# Altium PCB Power_Board_Layout_V2.PcbDoc (part 1 of 2)
Units mil, origin at the board's own origin, x right, y up, seen from the top; angles counter-clockwise.
Board outline 3500 x 4000 mil, 4 copper layers (Top Layer, GND, Power, Bottom Layer), stack 61.417 mil thick; 67 components, 53 nets, 226 pads, 441 vias.
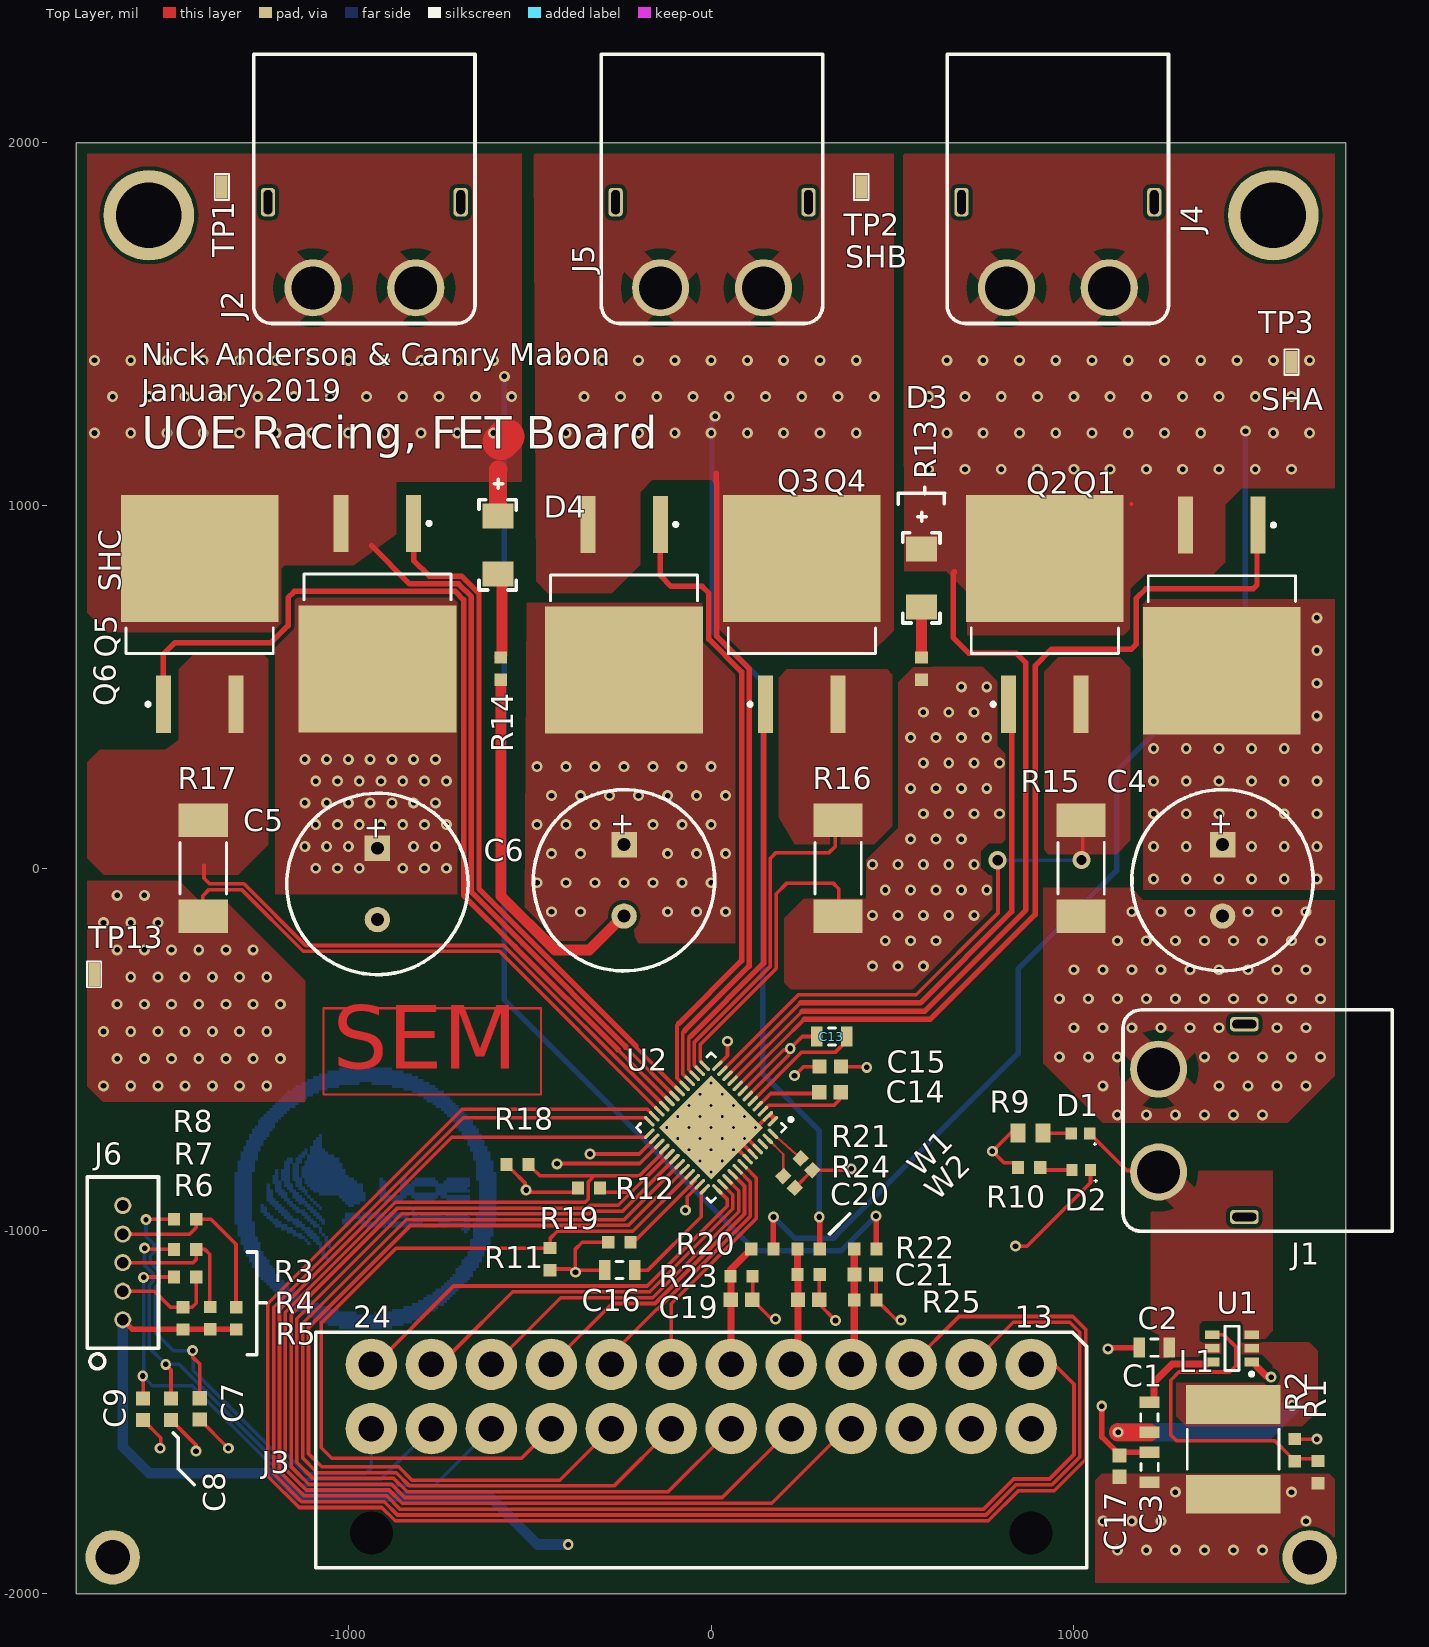
[diagram p0: Top Layer view]
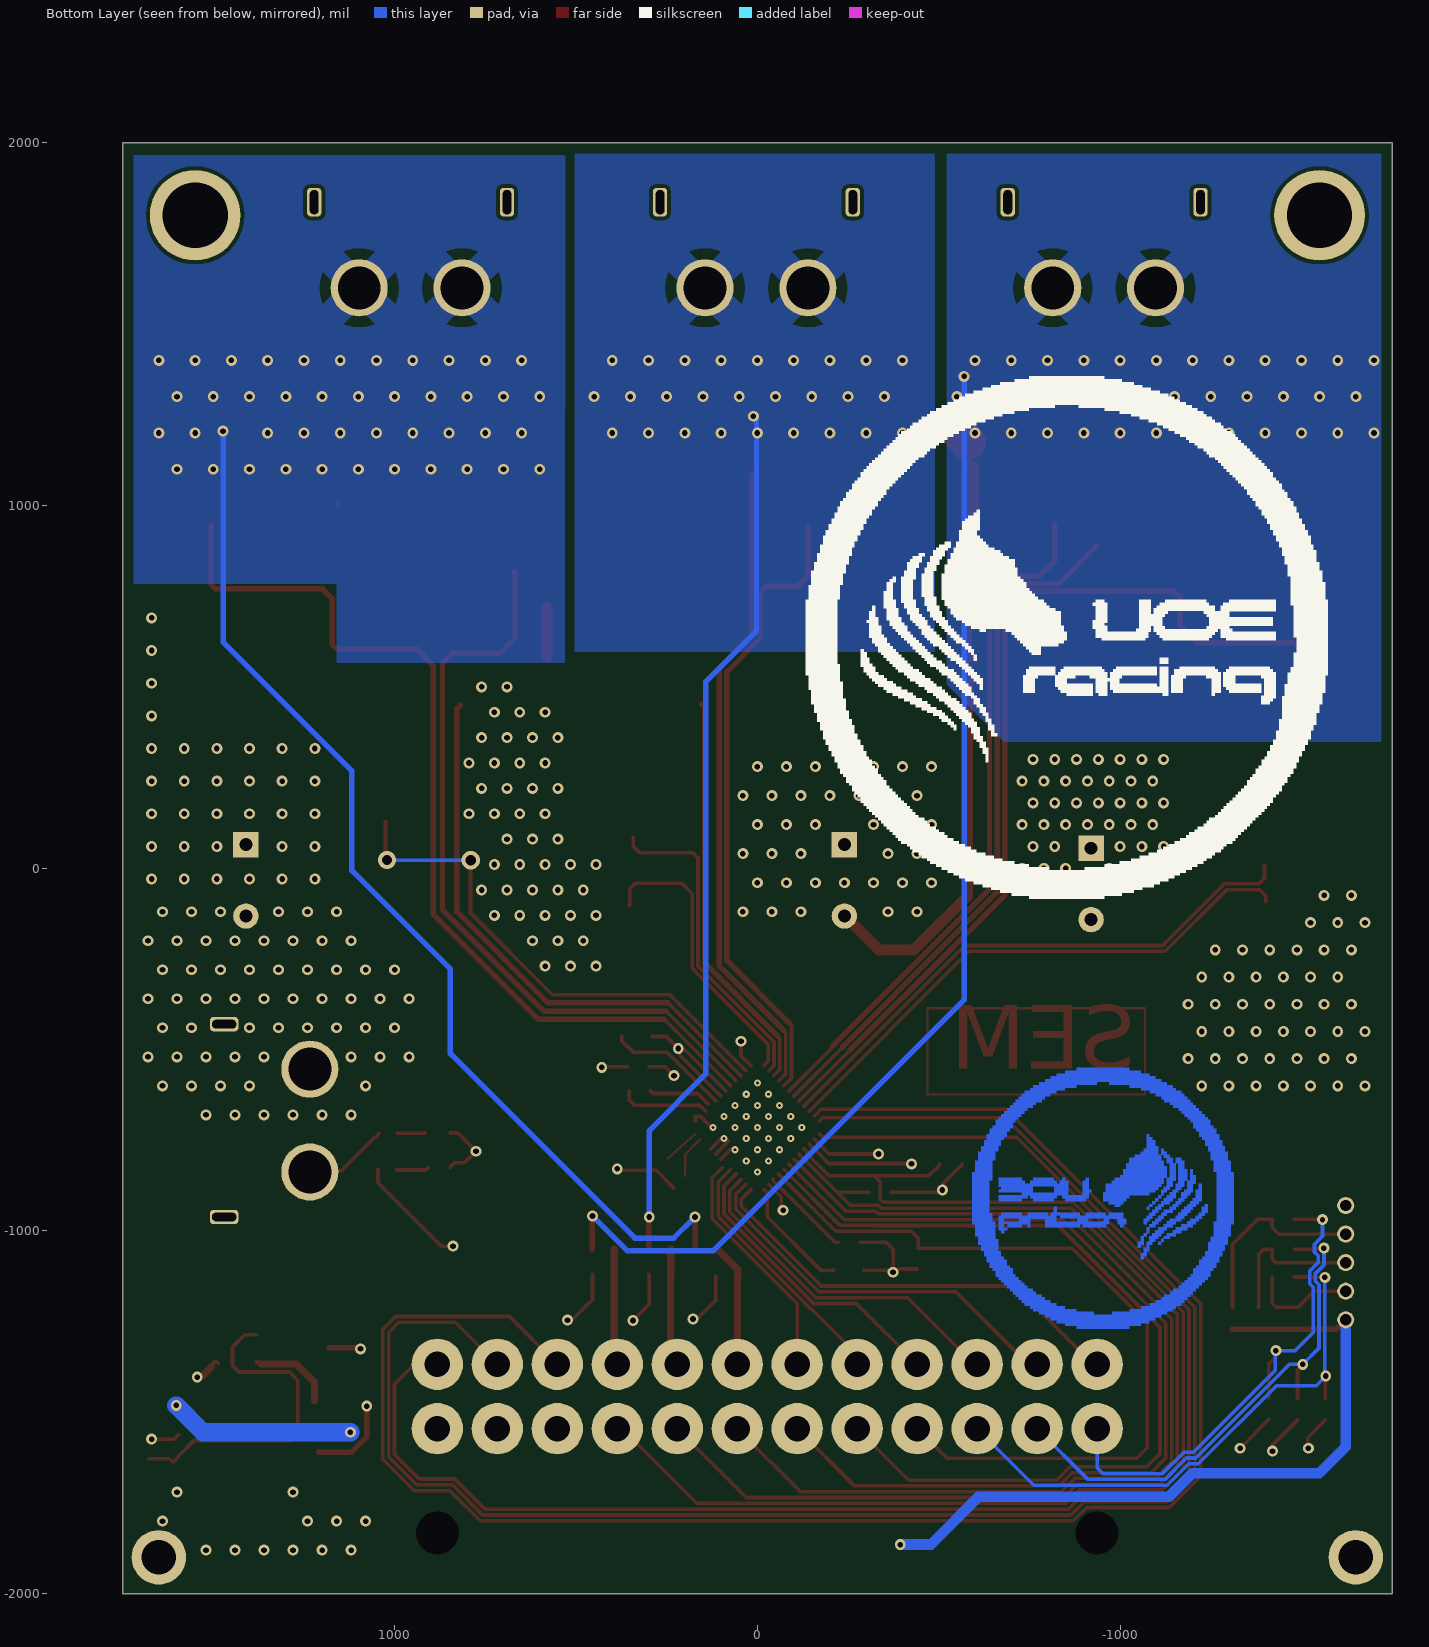
[diagram p1: Bottom Layer view, seen from below]
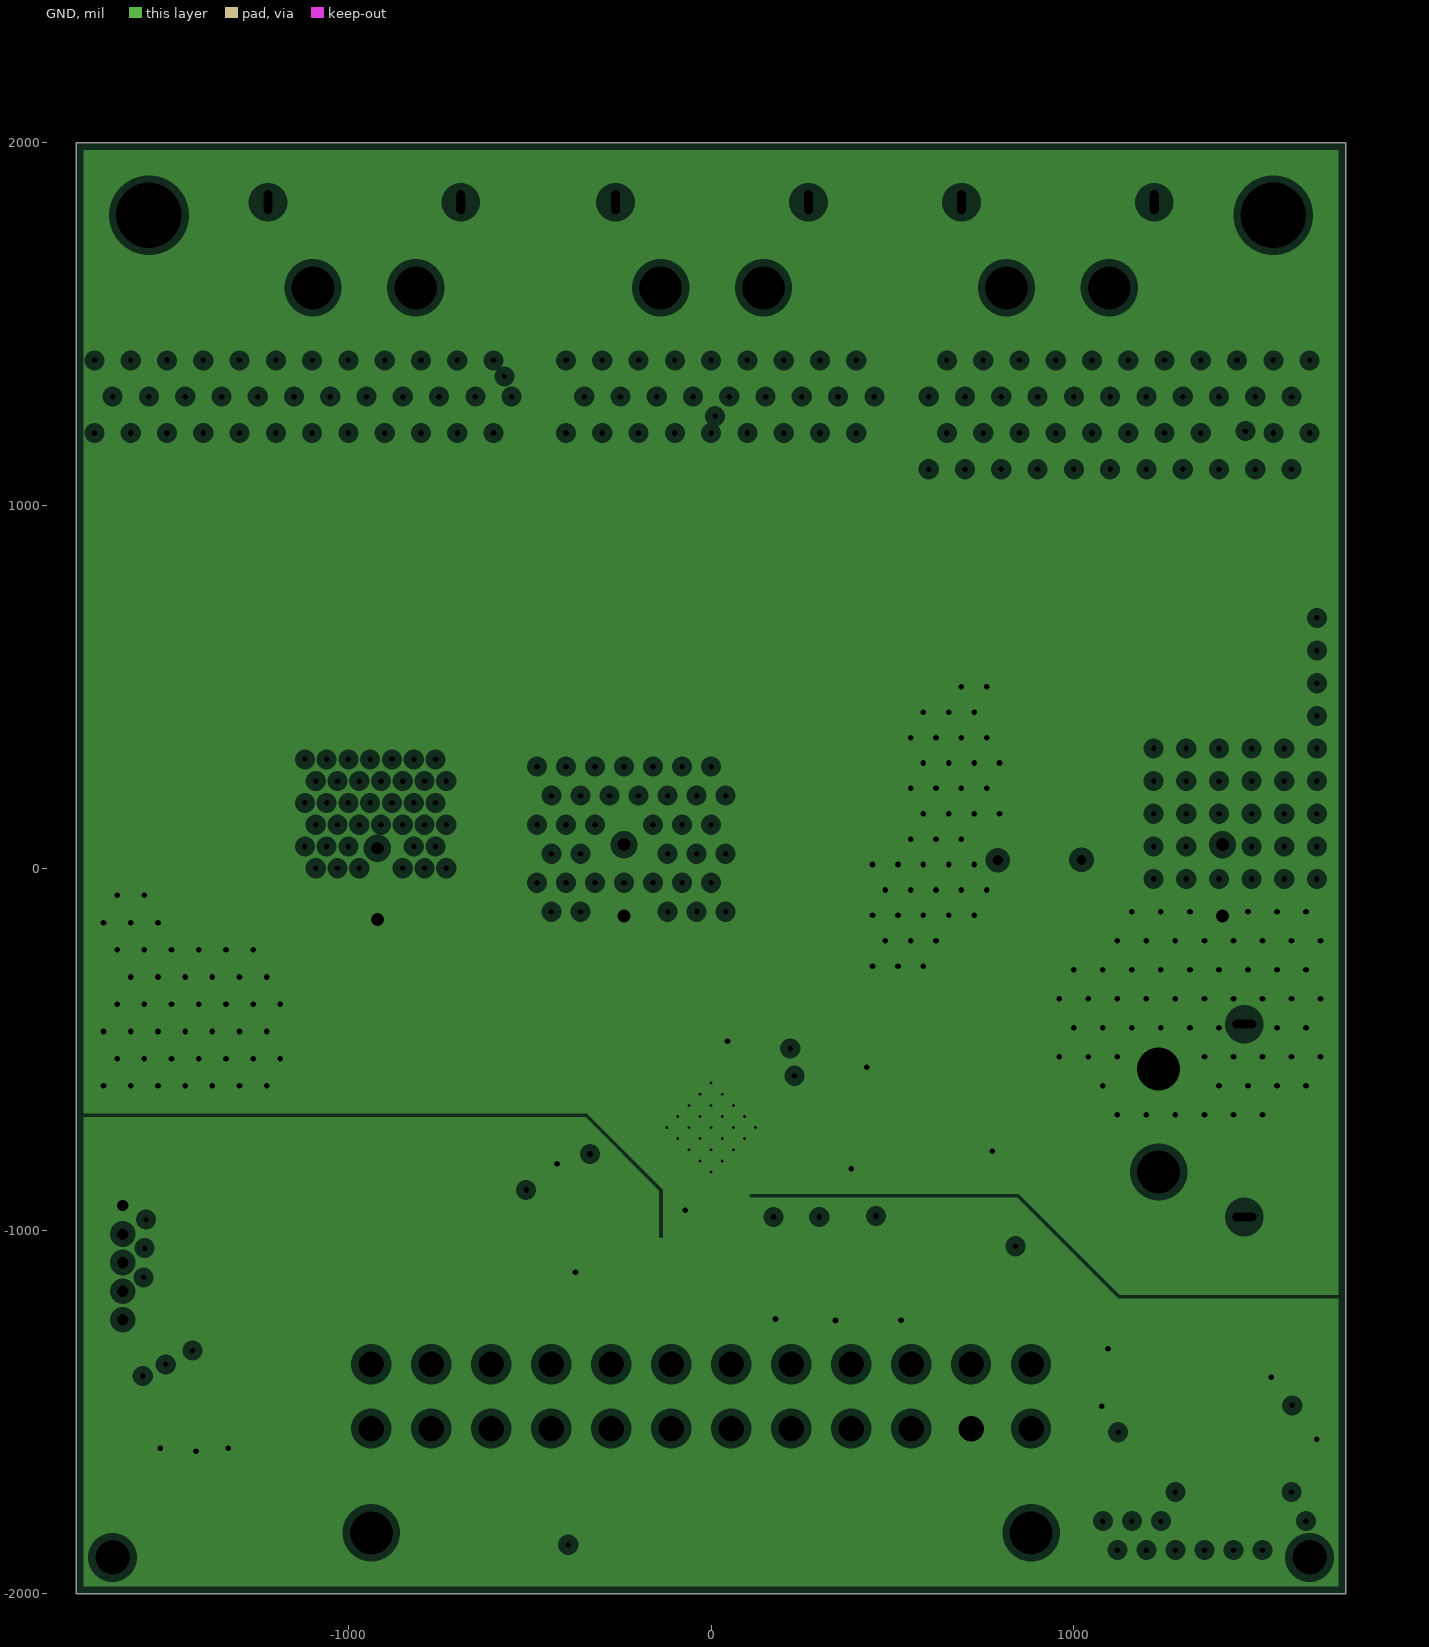
[diagram p2: GND, clearances drawn from the general rule]
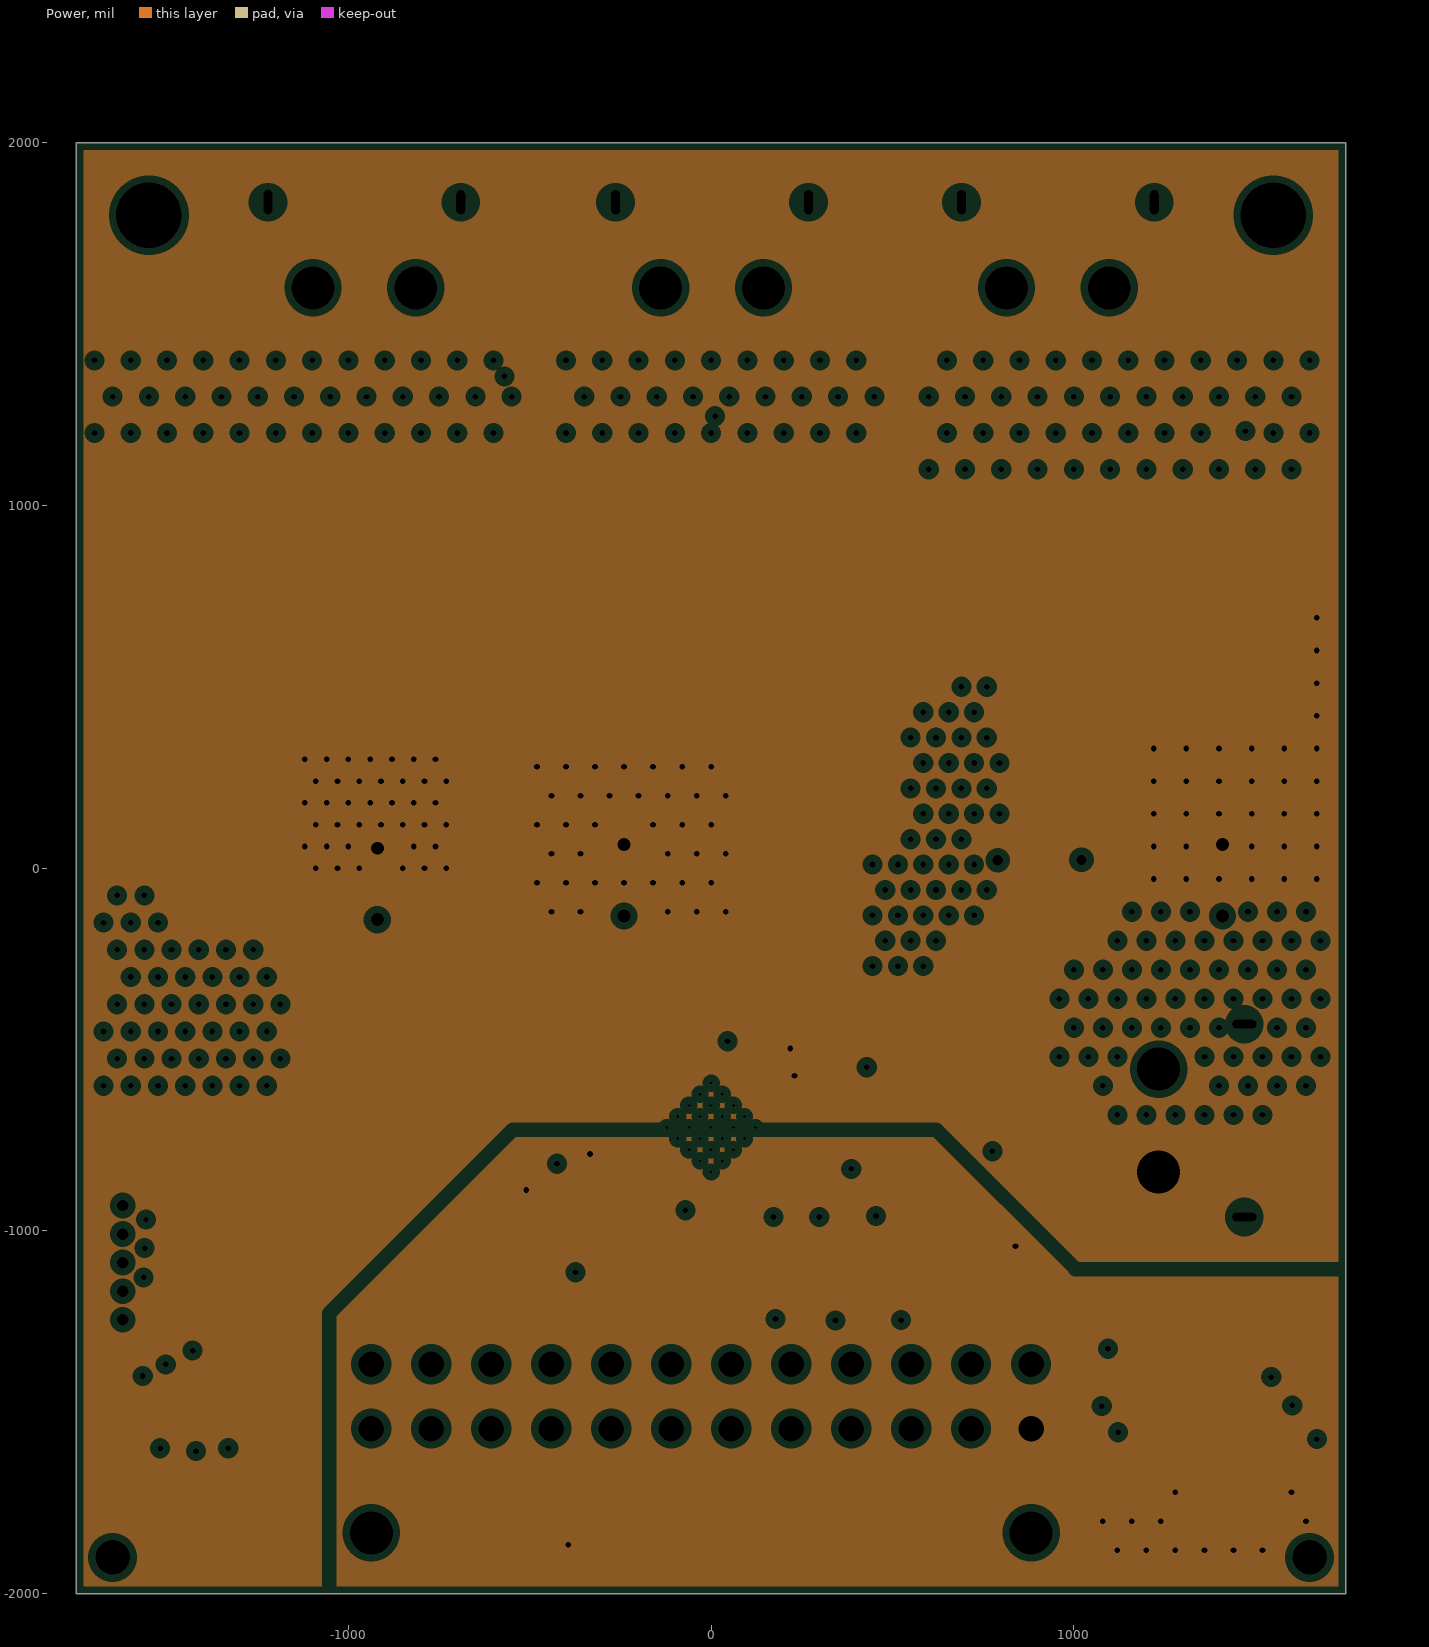
[diagram p3: Power, clearances drawn from the general rule]

## Layer stack, top to bottom
Top Solder: solder mask 1.3779, Solder Resist, Dk 3.5
Top Layer: signal copper 2.7559
Dielectric 2: prepreg 4.3307, PP-006, Dk 4.1
GND: plane copper 1.3778
Dielectric 4: core 44.4882, Core-009, Dk 4.5
Power: plane copper 1.3778
Dielectric 3: prepreg 4.3307, PP-006, Dk 4.1
Bottom Layer: signal copper 2.7559
Bottom Solder: solder mask 1.3779, Solder Resist, Dk 3.5

## Board outline
-1750,-2000 -1750,2000 1750,2000 1750,-2000

## Design rules (kind name [scope] priority, off if disabled: settings)
BoardOutlineClearance [All] p1: gap=30 ignorepadtopadclearanceinfootprint=FALSE
Clearance [All] p1: gap=6 ignorepadtopadclearanceinfootprint=TRUE except(8: Poly-Region Poly-Text Poly-Hole; 10: Arc-Poly Track-Poly SMDPad-Poly THPad-Poly Via-Poly Fill-Poly Poly-Poly)
HoleSize [All] p1: absolutevalues=TRUE maxlimit=300 minlimit=11 maxpercent=80.000 minpercent=20.000
MinimumAnnularRing MinimumAnnularRing_1 [All] p1: minimumring=10
MinimumAnnularRing [IsVia] p2: minimumring=10
MinimumSolderMaskSliver [All] p1: minsoldermaskwidth=6
PlaneClearance [InNetClass('HighPower-Motor')] p1: clearance=20
PlaneConnect [All] p1: planeconnectstyle=Direct reliefexpansion=20 reliefentries=4 reliefconductorwidth=10 reliefairgap=10
PolygonConnect [InComponentClass('Thermal Releif Needed')] p1: thpad.connectstyle=Relief thpad.reliefconductorwidth=80 thpad.reliefentries=4 thpad.polygonreliefangle="45 Angle" thpad.airgapwidth=30 smdpad.connectstyle=Direct smdpad.reliefconductorwidth=10 smdpad.reliefentries=4 smdpad.polygonreliefangle="90 Angle" smdpad.airgapwidth=10 via.connectstyle=Direct via.reliefconductorwidth=10 via.reliefentries=4 via.polygonreliefangle="90 Angle" via.airgapwidth=10
PolygonConnect "Current Resistors Connect" [(InComponentClass('Current Resistors'))] p2: connectstyle=Direct reliefconductorwidth=50 reliefentries=4 polygonreliefangle="45 Angle" airgapwidth=10
PolygonConnect "High Power Connect" [InNetClass('HighPower-Motor')] p3: connectstyle=Direct reliefconductorwidth=100 reliefentries=4 polygonreliefangle="45 Angle" airgapwidth=10
PolygonConnect Defualt [All] p4: connectstyle=Direct reliefconductorwidth=10 reliefentries=4 polygonreliefangle="90 Angle" airgapwidth=10
RoomDefinition "3.3V Regulator" [InComponentClass('3.3V Regulator')] p1: confinementstyle=ConfineIn formatcopy=TRUE lockcomponents=FALSE outline 1728,-1900.87 1728,-1030.87 1142.6,-1030.87 1142.6,-1900.87
RoutingVias [All] p1: holewidth=15.62 width=30 viastyle="Through Hole" minholewidth=12 minwidth=20 maxholewidth=28 maxwidth=50
SolderMaskExpansion [All] p1: expansion=4
Width [All] p1: maxlimit=200 minlimit=6 preferedwidth=10
26 further rules are at their usual default settings.

## Classes and differential pairs
component class "Thermal Releif Needed": J1 J2 J4 J5
component class "Current Resistors": R15 R16 R17 TP1 TP2 TP3 TP13
net class HighPower-Motor: +3.3V NetC1_2 SHA SHB SHC SPA SPB SPC V_BATT
component class "Gate Driver & H-Bridge": C13 C14 C15 C16 C17 C19 C20 C21 D3 D4 Q1 Q2 Q3 Q4 Q5 Q6 R11 R12 R13 R14 R15 R16 R17 R18 R19 R20 R21 R22 R23 R24 R25 TP1 TP2 TP3 U2
component class "Connectors & LEDs": C4 C5 C6 C7 C8 C9 D1 D2 J1 J2 J3 J4 J5 J6 R3 R4 R5 R6 R7 R8 R9 R10 TP13
component class "3.3V Regulator": C1 C2 C3 L1 R1 R2 U1

## Components (designator, comment, footprint, x,y, rotation, side; value= is the part's Value field where it differs from the comment)
C1 "Cap" CAPC2012X06N 1208,-1514 r270 top value=100nF
C2 "Cap" CAPC2012X06N 1222,-1322 r0 top value="1uF, 50V"
C3 "Cap" CAPC2012X06N 1209,-1651 r270 top value=22uF
C4 "470uF" ECA1JHG471 1410,-40 r270 top
C5 "470uF" ECA1JHG471 -920,-50 r270 top
C6 "470uF" ECA1JHG471 -240,-40 r270 top
C7 "16nF" "0603 CAP Medium" -1410,-1490.47 r90 top
C8 "16nF" "0603 CAP Medium" -1489,-1491.47 r90 top
C9 "16nF" "0603 CAP Medium" -1566,-1491.53 r90 top
C13 "Cap" CAPC2012X06N 333,-464 r0 top value=1uF
C14 "Cap" "0603 CAP Medium" 328,-618 r180 top value="47nF, 50V"
C15 "Cap" "0603 CAP Medium" 328.53,-546.97 r180 top value="0.1uF, 50V"
C16 "Cap" CAPC2012X06N -252.34,-1108 r0 top value=1uF
C17 "Cap" "0603 CAP Medium" 1126,-1648.47 r270 top value=0.1uF
C19 "Cap" "0603 CAP Medium" 84,-1190 r180 top value=47nF
C20 "Cap" "0603 CAP Medium" 268.94,-1189.96 r180 top value=47nF
C21 "Cap" "0603 CAP Medium" 425,-1120 r180 top value=47nF
D1 "RED LED" "CAPC1608X05L - Polarized" 1018,-731 r180 top
D2 "RED LED" "CAPC1608X05L - Polarized" 1020.41,-832 r180 top
D3 "Diode 11DQ03" Zener 580,800 r90 top
D4 "Diode 11DQ03" Zener -588,891 r90 top
J1 "XT-60" XTC60PW-M 1233.78,-695.75 r270 top
J2 "XT-60" XTC60PW-M -956,1600 r0 top
J3 "Molex 24-Pos" PCBComponent_1 -27.26,-1456.42 r0 top
J4 "XT-60" XTC60PW-M 956,1600 r0 top
J5 "XT-60" XTC60PW-M 2.5,1600 r0 top
J6 "5-Pos" "Hirose 5-pos" -1622,-1087.48 r270 top
L1 "Inductor" INDC8063X52N 1439,-1602 r270 top value=10uH
Q1 "CSD18536KTTT" DPAK254P1510X470-3M 1408,698 r270 top
Q2 "CSD18536KTTT" DPAK254P1510X470-3M 920,700 r90 top
Q3 "CSD18536KTTT" DPAK254P1510X470-3M -240,700 r270 top
Q4 "CSD18536KTTT" DPAK254P1510X470-3M 250,700 r90 top
Q5 "CSD18536KTTT" DPAK254P1510X470-3M -920,702.54 r270 top
Q6 "CSD18536KTTT" DPAK254P1510X470-3M -1410,700 r90 top
R1 "Res3" "RES 0603 MEDIUM" 1673,-1665 r90 top value=100K
R2 "Res3" "RES 0603 MEDIUM" 1609,-1604.49 r90 top value=22K
R3 "Res3" "RES 0603 MEDIUM" -1455.5,-1241 r270 top value=10K
R4 "Res3" "RES 0603 MEDIUM" -1381,-1240.51 r270 top value=10K
R5 "Res3" "RES 0603 MEDIUM" -1309,-1241 r270 top value=10K
R6 "Res3" "RES 0603 MEDIUM" -1450,-1127 r0 top value=100
R7 "Res3" "RES 0603 MEDIUM" -1450,-1051 r0 top value=100
R8 "Res3" "RES 0603 MEDIUM" -1450,-968 r0 top value=100
R9 "Res3" "0805 Res" 881,-730 r180 top value=1.5K
R10 "Res3" "RES 0603 MEDIUM" 877,-825 r180 top value=100
R11 "Res3" "RES 0603 MEDIUM" -444,-1078 r90 top value=10K
R12 "Res3" "RES 0603 MEDIUM" -336.51,-882 r180 top value=10K
R13 "Res3" "RES 0603 MEDIUM" 580,550 r90 top value=100
R14 "Res3" "RES 0603 MEDIUM" -580,550 r90 top value=100
R15 "Res3" RESC8032X08N 1020,0 r90 top value=0.001
R16 "Res3" RESC8032X08N 350,0 r90 top value=0.001
R17 "Res3" RESC8032X08N -1400,0 r90 top value=0.001
R18 "Res3" "RES 0603 MEDIUM" -533.51,-817 r180 top value=10K
R19 "Res3" "RES 0603 MEDIUM" -253,-1031.06 r0 top value=10K
R20 "Res3" "RES 0603 MEDIUM" 141,-1050 r180 top value=42.2K
R21 "Res3" "RES 0603 MEDIUM" 268.94,-1050 r180 top value=42.2K
R22 "Res3" "RES 0603 MEDIUM" 425,-1050 r180 top value=42.2K
R23 "Res3" "RES 0603 MEDIUM" 84,-1125.1 r0 top value=4.99K
R24 "Res3" "RES 0603 MEDIUM" 268.94,-1119.96 r0 top value=4.99K
R25 "Res3" "RES 0603 MEDIUM" 425,-1190 r0 top value=4.99K
TP1 "1625854-3" TE_RCU-0C -1349,1878 r90 top
TP2 "1625854-3" TE_RCU-0C 414,1878 r90 top
TP3 "1625854-3" TE_RCU-0C 1600,1395 r90 top
TP13 "1625854-3" TE_RCU-0C -1701,-293 r90 top
U1 "TPS54308DDCR" SOT95P280X110-6N 1436,-1324 r180 top
U2 "Driver Chip" QFN50P700X700X100_HS-49N 0,-715 r225 top
W1 "SMD Jumper" "SMD Jumper" 213,-863 r135 top
W2 "SMD Jumper" "SMD Jumper" 261,-814.28 r135 top

## Footprints (in the part's own frame and the unit in brackets; to place one, negate y for a bottom-side part, rotate by r counter-clockwise, add the part's x,y. Pads: shape width x height; smd on the part's side, far side on the other; paste and mask are expansions set on the pad)
"0603 CAP Medium" [mm]
  rect 1x1 smd: 1(-0.75,0) 2(0.75,0)
  body extent -0.85,-0.48 0.85,0.48, height 0.9
"0805 Res" [mm] "Chip Resistor, 2-Leads, Body 2.00x1.25mm, IPC Medium Density"
  rect 1.05x1.35 smd: 1(-0.875,0) 2(0.875,0)
  body extent -1.05,-0.67 1.05,0.67, height 0.65
"CAPC1608X05L - Polarized" [mm] "Chip Capacitor, 2-Leads, Body 1.60x0.80mm, IPC High Density"
  rect 0.8x0.85 smd: 1(-0.65,0) 2(0.65,0)
  silkscreen extent -1.14,0.63 -0.89,0.88, body extent -0.85,-0.45 0.85,0.45, height 0.5
CAPC2012X06N [mm] "Chip Capacitor, 2-Leads, Body 2.00x1.25mm, IPC Medium Density"
  rect 0.8x1.4 smd: 1(-1.05,0) 2(1.05,0)
  silkscreen extent -0.25,-0.6 0.25,0.6, body extent -1.05,-0.67 1.05,0.67, height 0.6
DPAK254P1510X470-3M [mm] "D2-PAK, 3-Pads, Body 7.73x8.49mm (max), IPC Low Density"
  rect 4x1.05 smd: 1(-6.3,2.54) 3(-6.3,-2.54)
  rect 8.9x11.05 smd: 2(3.9,0)
  silkscreen extent -6.42,-5.15 -0.95,5.15, body extent -6.98,-5.22 8.12,5.22, height 4.7
ECA1JHG471 [mil] "1"
  rect 70x70 hole 35.43: 1(-105,0)
  round 70 hole 35.43: 2(91.85,0)
  silkscreen extent -257,-250 243,250, body extent -253,-246 240,246, height 787
"Hirose 5-pos" [mm]
  round 1.2 hole 0.8: 1(4,0) 2(2,0) 3(0,0) 4(-2,0) 5(-4,0)
  silkscreen extent -6,-2.5 7.43,2.5
INDC8063X52N [mm] "Chip Inductor, 2-Leads, Body 8.00x6.30mm, IPC Medium Density"
  rect 2.72x6.62 smd: 1(-3.145,0) 2(3.145,0)
  silkscreen extent -1.4,-3.21 1.4,3.21, body extent -4.15,-3.3 4.15,3.3, height 5.2
PCBComponent_1 [mm]
  round 3.6 hole 1.8: 1(23.1,-2.25) 2(18.9,-2.25) 3(14.7,-2.25) 4(10.5,-2.25) 5(6.3,-2.25) 6(2.1,-2.25) 7(-2.1,-2.25) 8(-6.3,-2.25) 9(-10.5,-2.25) 10(-14.7,-2.25) 11(-18.9,-2.25) 12(-23.1,-2.25) 13(23.1,2.25) 14(18.9,2.25) 15(14.7,2.25) 16(10.5,2.25) 17(6.3,2.25) 18(2.1,2.25) 19(-2.1,2.25) 20(-6.3,2.25) 21(-10.5,2.25) 22(-14.7,2.25) 23(-18.9,2.25) 24(-23.1,2.25)
  round 1.524 hole 3: ""(-23.1,-9.55) ""(23.1,-9.55)
  silkscreen extent -27,-12 27,4.5, body extent -26,-16.8 26,8.4, height 11.4
QFN50P700X700X100_HS-49N [mm] "QFN, 48-Leads, Body 7.00x7.00mm, Pitch 0.50mm, Thermal Pad 5.15x5.15mm, IPC Medium Density"
  oval 0.95x0.25 smd: 1(-3.375,2.75) 2(-3.375,2.25) 3(-3.375,1.75) 4(-3.375,1.25) 5(-3.375,0.75) 6(-3.375,0.25) 7(-3.375,-0.25) 8(-3.375,-0.75) 9(-3.375,-1.25) 10(-3.375,-1.75) 11(-3.375,-2.25) 12(-3.375,-2.75) 25(3.375,-2.75) 26(3.375,-2.25) 27(3.375,-1.75) 28(3.375,-1.25) 29(3.375,-0.75) 30(3.375,-0.25) 31(3.375,0.25) 32(3.375,0.75) 33(3.375,1.25) 34(3.375,1.75) 35(3.375,2.25) 36(3.375,2.75)
  oval 0.25x0.95 smd: 13(-2.75,-3.375) 14(-2.25,-3.375) 15(-1.75,-3.375) 16(-1.25,-3.375) 17(-0.75,-3.375) 18(-0.25,-3.375) 19(0.25,-3.375) 20(0.75,-3.375) 21(1.25,-3.375) 22(1.75,-3.375) 23(2.25,-3.375) 24(2.75,-3.375) 37(2.75,3.375) 38(2.25,3.375) 39(1.75,3.375) 40(1.25,3.375) 41(0.75,3.375) 42(0.25,3.375) 43(-0.25,3.375) 44(-0.75,3.375) 45(-1.25,3.375) 46(-1.75,3.375) 47(-2.25,3.375) 48(-2.75,3.375)
  rect 5.15x5.15 smd: 49(0,0)
  silkscreen extent -4.47,-3.7 3.7,3.7, body extent -3.55,-3.55 3.55,3.55, height 1
"RES 0603 MEDIUM" [mm] "Chip Resistor, 2-Leads, Body 1.60x0.80mm, IPC Medium Density"
  rect 0.85x0.9 smd: 1(-0.775,0) 2(0.775,0)
  body extent -0.85,-0.45 0.85,0.45, height 0.55
RESC8032X08N [mm] "Chip Resistor, 2-Leads, Body 8.00x3.18mm, IPC Medium Density"
  rect 2.35x3.45 smd: 1(-3.35,0) 2(3.35,0)
  silkscreen extent -1.8,-1.63 1.8,1.63, body extent -4.15,-1.72 4.15,1.72, height 0.85
"SMD Jumper" [mm] "To be used only as a jumper"
  rect 0.8x0.85 smd: 1(-0.65,0) 2(0.508,0)
SOT95P280X110-6N [mm] "SOT23, 6-Leads, Body 2.90x2.80mm, Pitch 0.95mm, IPC Medium Density"
  rect 1x0.6 smd: 1(-1.375,0.95) 2(-1.375,0) 3(-1.375,-0.95) 4(1.375,-0.95) 5(1.375,0) 6(1.375,0.95)
  silkscreen extent -1.5,-1.55 0.5,1.92, body extent -0.88,-1.52 0.87,1.53, height 1.1
TE_RCU-0C [mm]
  rect 1.6x0.8 smd: 1(0,0)
  silkscreen extent -0.9,-0.5 0.9,0.5
XTC60PW-M [mm] "Male right angle xt60"
  round 4 hole 3: 1(3.6,0) 2(-3.6,0)
  rrect50% 1x2 hole 0.6 slot 1.7 at 90 deg: 3(-6.75,6) 4(6.75,6)
  silkscreen extent -7.75,-2.5 7.75,16.35, body extent -7.75,-1.91 7.75,16.29, height 2
Zener [mil]
  rect 70x85 smd: 1(-80,0) 2(80,0)
  silkscreen extent -124,-51 181,52

## Part data
C1 C2 C3 C13 C14 C15 C16 C17 C19 C20 C21: "Capacitor", LatestRevisionDate=17-Jul-2002, LatestRevisionNote="Re-released for DXP Platform.", PackageDescription="Radial Cap, Thru-Hole; 2 Leads; 0.3 in Pin Spacing", PackageReference=RAD-0.3, Published=8-Jun-2000, Publisher="Altium Limited"
  C1: ComponentLink1Description="0.1uF, 50V", ComponentLink1URL=https://www.digikey.ca/product-detail/en/kemet/C0805C104M5RACTU/399-1169-1-ND/411444
  C2: ComponentLink1Description="1uF, 50V", ComponentLink1URL=https://www.digikey.ca/product-detail/en/kemet/C0805C105K5RACTU/399-7409-1-ND/3317443
  C3: ComponentLink1Description="22uF, 10V", ComponentLink1URL=https://www.digikey.com/product-detail/en/tdk-corporation/C2012X7S1A226M125AC/445-14560-1-ND/3956226
  C13 C16: ComponentLink1Description="1uF, 50V", ComponentLink1URL=https://www.digikey.ca/product-detail/en/samsung-electro-mechanics/CL21B105KBFNNNG/1276-6470-1-ND/5958098
  C14 C19 C20 C21: ComponentLink1Description="0.047uF, 50V", ComponentLink1URL=https://www.digikey.ca/product-detail/en/samsung-electro-mechanics/CL10B473KB8NFNC/1276-2075-1-ND/3890161
  C15 C17: ComponentLink1Description="0.1uF, 50V", ComponentLink1URL=https://www.digikey.ca/product-detail/en/samsung-electro-mechanics/CL10B104KB8WPNC/1276-6854-1-ND/5961713
C4 C5 C6: library part ECA-1JHG471, "Cap Aluminum Lytic 470uF 63V 20% (12.5 X 20mm) Radial 5mm 640mA 2000h 105C Bulk", Case/Package=Radial, Leakage Current=3uA, Manufacturer=Panasonic, Max Operating Temperature=105°C, Min Operating Temperature=-55°C, Package Quantity=200, Ripple Current=640mA, Tolerance=20%, Voltage=63V, Capacitance=470uF, ComponentLink1Description=https://datasheet.ciiva.com/14590/70067776-14590006.pdf, ComponentLink1URL=https://datasheet.ciiva.com/14590/70067776-14590006.pdf, ComponentLink2Description=https://datasheet.ciiva.com/17356/aba0000ce26-17356313.pdf, ComponentLink2URL=https://datasheet.ciiva.com/17356/aba0000ce26-17356313.pdf, ComponentLink3Description=https://datasheet.ciiva.com/48521/radial-nhg-eng-tds-48521993.pdf, ComponentLink3URL=https://datasheet.ciiva.com/48521/radial-nhg-eng-tds-48521993.pdf, ComponentLink4Description=https://datasheet.ciiva.com/30116/8aba0000ce26-30116426.pdf, ComponentLink4URL=https://datasheet.ciiva.com/30116/8aba0000ce26-30116426.pdf, ComponentLink5Description=https://datasheet.ciiva.com/2984/aba0000ce26-2984364.pdf, ComponentLink5URL=https://datasheet.ciiva.com/2984/aba0000ce26-2984364.pdf, ComponentLink6Description=https://datasheet.ciiva.com/11783/0900766b800301b8-11783820.pdf, ComponentLink6URL=https://datasheet.ciiva.com/11783/0900766b800301b8-11783820.pdf, ComponentLink7Description=https://datasheet.ciiva.com/43485/1504317-43485276.pdf, ComponentLink7URL=https://datasheet.ciiva.com/43485/1504317-43485276.pdf, Contact Plating=Tin, Diameter=12.5mm, Dissipation Factor=0.1%, Height=20mm, Height - Seated (Max)=0.866inch, Lead/Base Style=Straight, Lead Diameter=0.6mm, Lead Pitch=5mm, Length=20mm, Life (Hours)=2000Hour, Manufacturer Part Number=ECA-1JHG471, Mount="Through Hole,PCB", Packaging=Bulk, Polarity=Polar, Pricing 1="1=0.88, 10=0.67, 100=0.4792, 500=0.371, 1000=0.31948, 2500=0.29887, 5000=0.28341 (USD)", Radiation Hardening=No, REACH SVHC="No SVHC", Stock 1=12555, Supplier 1=Digi-Key, Termination=Radial, Voltage Rating=63V, Voltage Rating (DC)=63V
C7 C8 C9: library part 06035C163KAT2A, "Multilayer Ceramic Capacitors MLCC - SMD/SMT 50volts 0.016uF 10% X7R", Case/Package=0603, Case Code (Metric)=1608, Dielectric=X7R, Manufacturer="Kyocera AVX", Max Operating Temperature=125°C, Min Operating Temperature=-55°C, Package Quantity=4000, Tolerance=10%, Voltage Rating=50V, Capacitance=16nF, Case Code (Imperial)=0603, ComponentLink1Description=https://datasheet.ciiva.com/205/cx7r-205833.pdf, ComponentLink1URL=https://datasheet.ciiva.com/205/cx7r-205833.pdf, ComponentLink2Description=https://datasheet.ciiva.com/5418/cx7r-218113-5418475.pdf, ComponentLink2URL=https://datasheet.ciiva.com/5418/cx7r-218113-5418475.pdf, Depth=0.81mm, Dissipation Factor=2.5%, Length=1.6mm, Manufacturer Part Number=06035C163KAT2A, Mount="Surface Mount", Number of Pins=2, Packaging="Tape and Reel", Pricing 1="1=0.33, 10=0.224, 100=0.1271, 500=0.0897, 1000=0.07849 (USD)", Radiation Hardening=No, Stock 1=10610, Supplier 1=Digi-Key, Supplier 2=Digi-Key, Termination=SMD/SMT, Thickness=0.035inch, Voltage Rating (DC)=50V, Width=0.032inch
D1 D2: library part LTST-C191KRKT, "LED RED CLEAR 0603 SMD", Case/Package=0603, Case Code (Metric)=1608, Colour=Red, Current=2A, Forward Current=30mA, Forward Voltage=2V, Lens Colour=Colorless, Manufacturer="Vishay Lite-On", Max Operating Temperature=85°C, Min Operating Temperature=-55°C, Package Quantity=1, Power Dissipation=75mW, Reverse Voltage=5V, Test Current=20mA, Case Code (Imperial)=0603, ComponentLink1Description=http://optoelectronics.liteon.com/upload/download/DS22-2000-223/LTST-C191KRKT.PDF, ComponentLink1URL=http://optoelectronics.liteon.com/upload/download/DS22-2000-223/LTST-C191KRKT.PDF, ComponentLink2Description=http://www1.futureelectronics.com/doc/LITE-ON/LTST-C191KRKT.pdf, ComponentLink2URL=http://www1.futureelectronics.com/doc/LITE-ON/LTST-C191KRKT.pdf, ComponentLink3Description=https://www.verical.com/server-webapp/html/getDatasheet?partID=141922, ComponentLink3URL=https://www.verical.com/server-webapp/html/getDatasheet?partID=141922, ComponentLink4Description=http://www.mouser.com/ds/2/239/LTST-C191KRKT-1140668.pdf, ComponentLink4URL=http://www.mouser.com/ds/2/239/LTST-C191KRKT-1140668.pdf, Depth=0.8mm, Dominant Wavelength=631nm, Height=0.55mm, Illumination Colour=Red, Lead Free="Lead Free", Length=1.6mm, Lens Style=Clear,Colorless,Diffused,Rectangular, Lens Transparency=Clear, Luminous Intensity=54mcd, Manufacturer Part Number=LTST-C191KRKT, Mount="Surface Mount", Number of Elements=1, Number of LEDs=1, Number of Pins=2, Packaging="Tape and Reel", Power Rating=75mW, Pricing 1="1=0.059, 250=0.048, 750=0.046, 1500=0.045, 2500=0.043 (USD)", Radiation Hardening=No, Stock 1=1170, Supplier 1="Future Electronics", Viewing Angle=130°, Voltage=2V, Wavelength=639nm, Width=0.8mm
D3 D4: "Schottky Rectifier", Code_JEDEC=DO-204-AL, ComponentLink1Description=Zener, ComponentLink1URL=https://www.digikey.ca/product-detail/en/micro-commercial-co/SMBJ5362B-TP/SMBJ5362B-TPMSCT-ND/1636228, DatasheetVersion=Dec-1997, LatestRevisionDate=17-Jul-2002, LatestRevisionNote="Re-released for DXP Platform.", PackageDescription="Diode, Axial; Body 5.2 x 2.7 mm (LxDia. max), Lead Dia. 0.86 mm (max)", PackageReference=DO-204AL, Published=8-Jun-2000, Publisher="Altium Limited"
J1 J2 J4 J5: "XT-60 Power Connector", Current_Max=60, ComponentLink1Description=Mechanical, ComponentLink1URL=https://cdn.sparkfun.com/datasheets/Prototyping/xt60.pdf
J3: library part "Molex 24-Pos (0039301240)"
J6: library part "5 pos", ComponentLink1Description="5-pos Hirose", ComponentLink1URL=https://www.digikey.ca/product-detail/en/hirose-electric-co-ltd/DF3A-5P-2DSA/H2097-ND/141521
L1: "PN: SRR6038-100Y                                                   10µH Shielded Wirewound Inductor 2A 38 mOhm Max Nonstandard", Code_IEC=1005, Code_JEITA=0402, ComponentLink1Description="10uH, 2.05A", ComponentLink1URL=https://www.digikey.com/product-detail/en/bourns-inc/SRR6038-100Y/SRR6038-100YCT-ND/2127571, ComponentLink2Description="10uH, Better Footprint", ComponentLink2URL=https://www.digikey.ca/product-detail/en/abracon-llc/ASPIAIG-S8050-100M-T/535-13652-1-ND/6595963, LatestRevisionDate=29-May-2009, LatestRevisionNote="IPC-7351 Footprint Added.", PackageDescription="Chip Inductor", PackageReference=0402-A, Published=8-Jun-2000, Publisher="Altium Limited"
Q1 Q2 Q3 Q4 Q5 Q6: "TEXAS INSTRUMENTS         CSD18536KTTT             MOSFET Transistor, NexFET, N Channel, 349 A, 60 V, 0.0013 ohm, 10 V, 1.8 V", Case/Package=D2PAK, Continuous Drain Current (ID)=349A, Drain to Source Voltage (Vdss)=60V, Input Capacitance=11.43nF, Manufacturer="Texas Instruments", Max Operating Temperature=175°C, Max Power Dissipation=375W, Min Operating Temperature=-55°C, Threshold Voltage=1.8V, Element Configuration=Single, Lead Free="Contains Lead", Manufacturer Part Number=CSD18536KTTT, Mount="Surface Mount", Number of Pins=3, Packaging="Tape and Reel", Pricing 1="1 = 5.25000, 10 = 4.69200 (USD)", Rds On Max=1.6mR, REACH SVHC="No SVHC", RoHS=No, Stock 1=306, Supplier 1=Digi-Key
R1 R2 R3 R4 R5 R6 R7 R8 R9 R10 R11 R12 R13 R14 R15 R16 R17 R18 R19 R20 R21 R22 R23 R24 R25: "Resistor", LatestRevisionDate=29-May-2009, LatestRevisionNote="IPC-7351 Footprint Added.", PackageDescription="Chip Resistor", PackageReference=J1-0603, Published=8-Jun-2000, Publisher="Altium Limited"
  R1: ComponentLink1Description=100KOhm, ComponentLink1URL=https://www.digikey.ca/product-detail/en/vishay-dale/RCA0603100KFKEAHP/541-3247-1-ND/6561261
  R2: ComponentLink1Description=22KOhm, ComponentLink1URL=https://www.digikey.ca/product-detail/en/vishay-dale/CRCW060322K0FKEAHP/541-22.0KSCT-ND/2825994
  R3 R4 R5 R11 R12 R18 R19: ComponentLink1Description=10KOhm, ComponentLink1URL=https://www.digikey.ca/product-detail/en/vishay-dale/CRCW060310K0FKEAHP/541-10.0KSCT-ND/2222780
  R6 R7 R8 R10: ComponentLink1Description=100Ohm, ComponentLink1URL=https://www.digikey.ca/product-detail/en/vishay-dale/CRCW0603100RFKEA/541-100HCT-ND/1179695
  R9: ComponentLink1Description=1.5KOhm, ComponentLink1URL=https://www.digikey.ca/product-detail/en/rohm-semiconductor/ESR10EZPJ152/RHM1.5KKCT-ND/1762968
  R13 R14: ComponentLink1Description=100Ohm, ComponentLink1URL=https://www.digikey.ca/product-detail/en/vishay-dale/RCP0603W100RGEB/541-2653-2-ND/5481867
  R15 R17: ComponentLink1Description="CS Res", ComponentLink1URL=https://www.digikey.ca/product-detail/en/stackpole-electronics-inc/CSNL2512FT1L00/CSNL2512FT1L00CT-ND/1646259
  R20 R21 R22: ComponentLink1Description=42.2KOhm, ComponentLink1URL=https://www.digikey.ca/product-detail/en/stackpole-electronics-inc/RMCF0603FT42K2/RMCF0603FT42K2CT-ND/1943096
  R23 R24 R25: ComponentLink1Description=4.99KOhm, ComponentLink1URL=https://www.digikey.ca/product-detail/en/vishay-dale/CRCW06034K99FKEAC/541-3985-1-ND/7928668
TP1 TP2 TP3 TP13: library part RCU-0C, "0603 PROBE PAD", Package=0603, Power_Rating="0 W", Resistance=<.05, Tolerance=0%, Digi-Key_Part_Number=A106145CT-ND, Digi-Key_Purchase_URL=https://www.digikey.ca/product-detail/en/te-connectivity-amp-connectors/RCU-0C/A106145CT-ND/3477802?utm_source=snapeda&utm_medium=aggregator&utm_campaign=symbol, EU_RoHS_Compliance=Compliant, MF="TE Connectivity", MP=RCU-0C, SnapEDA_Link=https://www.snapeda.com/parts/RCU-0C/TE%20Connectivity%20AMP%20Connectors/view-part/?ref=snap, TE_purchase_URL=https://www.te.com/usa-en/product-1625854-3.html?te_bu=Cor&te_type=disp&te_campaign=seda_glo_cor-seda-global-disp-prtnr-fy19-seda-model-bom-cta_sma-317_1&elqCampaignId=32493
U1: "Buck Switching Regulator IC Positive Adjustable 1V 1 Output 3A SOT-23-6 Thin, TSOT-23-6"
W1 W2: "SMD solder jumper"
U2: ComponentLink1Description="Gate Driver", ComponentLink1URL=https://www.digikey.ca/product-detail/en/texas-instruments/DRV8323RSRGZT/296-46943-1-ND/7356148

## Free pads (board coordinates)
  round 150 hole 94.5: 3(-1650,-1900) 3(1650,-1900)
  round 250 hole 180: 3(-1550,1800) 3(1550,1800)

## Via types
v1: diameter 30, hole 15.62, Top Layer to Bottom Layer, 411 vias
v2: diameter 19.68, hole 7.87, Top Layer to Bottom Layer, 25 vias
v3: diameter 30, hole 15, Top Layer to Bottom Layer, 3 vias
v4: diameter 50, hole 28, Top Layer to Bottom Layer, 2 vias

## Nets (pads, with @x,y where several pads share a name; then routed paths per layer and width w, separated by ;. In a path a pad name is that pad's centre, name@x,y a point inside that pad or via, vN(x,y) a via of type N, cw(c..) or ccw(c..) an arc to the next point about the centre after c; other vN are vias at no path point)
+3.3V: C3.2 C17.2 D2.1 J3.1 J6.1 L1.2 R1.1 R3.2 R4.2 R5.2 R12.2 R18.2 U2.26 | length 2759
  Top Layer w10: R18.2 -564.02,-817.98 -552.29,-829.72 -551.31,-829.72 -513.22,-867.8 -513.22,-883.78 v1(-510,-887) -504,-893 R12.2@-369.51,-893 ; v1(-334,-788) -198.27,-788 U2.26 ; v1(839,-1042) 871,-1042 1046,-867 D2.1
  Top Layer w15: J6.1 -1595.45,-1271.51 R3.2 R5.2
  Bottom Layer w30: J6.1 -1622,-1595 -1548.98,-1668.02 -1200,-1668.02 -1135.02,-1733 -610,-1733 -478,-1865 v1(-394,-1865)
  other v1: 1120,-1880 1200,-1880 1280,-1880 1360,-1880 1440,-1880 1520,-1880 1080,-1800 1160,-1800 1240,-1800 1640,-1800 1280,-1720 1600,-1720
CAL: R19.2 U2.34 | length 247.7
  Top Layer w10: R19.2 R19.2@-219.54,-1031.06 ; R19.2@-213.94,-1030.94 -82.37,-899.37 -82,-899.37 -72.63,-890 -72.35,-890 -44,-861.65 U2.34@-44,-857
Enable: J3.9 R11.2 U2.33 | length 2231.6
  Top Layer w10: J3.9@-440.71,-1545 -522.57,-1626.87 -1046.02,-1626.87 -1075,-1597.89 -1075,-1254 -868.49,-1047.49 R11.2 -444,-1021 -424,-1001 -216,-1001 U2.33@-58,-843 ; J3.9 J3.9@-435.94,-1545
GHA: Q1.1 U2.8 | length 2644.3
  Top Layer w10: U2.8 193.24,-480 193.24,-479.76 256,-417
  Top Layer w15: 256,-417 604,-417 893,-128 893,558 939,604 1159,604 1172,617 1172,743.78 1198.22,770 1494,770 1505,781 Q1.1@1505,945
GHB: Q3.1 U2.17 | length 1774.2
  Top Layer w10: Q3.1@-140,935.86 Q3.1 ; -88.98,-427.02 -88.98,-427.98 -94,-433 -94,-579.13 -73.08,-600.05 U2.17
  Top Layer w15: Q3.1@-140,935.86 -140,807 -110,777 -25,777 -6,758 -6,631.3 84,541.3 84,-255 -88.98,-427.98
GHC: Q5.1 U2.18 | length 1917.1
  Top Layer w10: -207.91,-493.09 -87,-614 U2.18
  Top Layer w15: Q5.1@-820,950 -820,848 -777,805 -687.6,805 -640,757.4 -640,-57 -207.21,-489.79
GLA: Q2.1 U2.10 | length 1543.3
  Top Layer w10: U2.10 246.56,-371
  Top Layer w15: 246.56,-371 577,-371 828.5,-119.5 828.5,439.5 Q2.1@819,449
GLB: Q4.1 U2.15 | length 1120.3
  Top Layer w10: -56.98,-463.98 -62,-469 -62,-555.45 -45.24,-572.21 U2.15
  Top Layer w15: -56.98,-463.98 145,-262 145,443.97 Q4.1@153,451.97
GLC: Q6.1 U2.20 | length 2709.4
  Top Layer w10: -256.63,-500.13 U2.20
  Top Layer w15: Q6.1 -1510,590.09 -1478.09,622 -1213,622 -1166,669 -1166,746 -1149,763 -705,763 -682,740 -682,-74.76 -540.21,-216.55 -540.21,-216.79 -256.87,-500.13 -256.63,-500.13
HALL_A: C9.2 J3.10 R6.1 | length 1570.1
  Top Layer w10: v1(-1567,-1400) -1566,-1401 C9.2 ; v3(-1564.5,-1128) -1563.5,-1127 R6.1
  Bottom Layer w10: v3(-1564.5,-1128) -1564.5,-1397.5 v1(-1567,-1400) -1540.42,-1426.58 -1431.04,-1426.58 -1215.6,-1642.02 -1189.23,-1642.02 -1130.25,-1701 -762.06,-1701 J3.10@-606.06,-1545
HALL_B: C8.2 J3.11 R7.1 | length 1457.4
  Top Layer w10: v3(-1562,-1047.49) -1558.49,-1051 R7.1 ; v1(-1503.55,-1367.83) -1503.55,-1369.14 -1489,-1383.69 C8.2
  Bottom Layer w10: v3(-1562,-1047.49) -1562,-1093.73 -1538.5,-1117.23 -1538.5,-1138.77 -1548.5,-1148.77 -1548.5,-1322.89 v1(-1503.55,-1367.83) -1467.17,-1367.83 -1208.98,-1626.02 -1182.6,-1626.02 -1123.63,-1685 -911.42,-1685 J3.11
HALL_C: C7.2 J3.12 R8.1 | length 1457.9
  Top Layer w10: v3(-1558.02,-969) -1557.02,-968 R8.1 ; v1(-1429.49,-1330) -1429.49,-1347.51 -1410,-1367 C7.2
  Bottom Layer w10: v3(-1558.02,-969) -1558.02,-1014.69 -1536,-1036.72 -1536,-1058.26 -1546,-1068.26 -1546,-1087.1 -1522.5,-1110.6 -1522.5,-1145.4 -1532.5,-1155.4 -1532.5,-1279.88 -1482.37,-1330 v1(-1429.49,-1330) -1427.69,-1331.8 -1427.69,-1384.69 -1202.35,-1610.02 -1175.98,-1610.02 -1117,-1669 -952,-1669 -936.77,-1653.77 J3.12@-936.77,-1545
INHA: J3.24 U2.37 | length 1212.4
  Top Layer w10: J3.24@-929,-1371 -710,-1152 -175.88,-1152 44,-932.12 44,-912.11 U2.37
INHB: J3.22 U2.39 | length 940.5
  Top Layer w10: J3.22 J3.22@-582.2,-1344.03 ; J3.22@-565,-1338 -565,-1334.25 -414.75,-1184 -161.25,-1184 76,-946.75 76,-889 U2.39@45,-858
INHC: J3.20 U2.41 | length 710.3
  Top Layer w10: J3.20@-277,-1365 -277,-1343 -150,-1216 -148,-1216 108,-960 108,-865 73.08,-830.08 U2.41
INLA: J3.23 U2.38 | length 1060.1
  Top Layer w10: J3.23@-778.94,-1371 J3.23@-751.97,-1344.03 ; J3.23@-718,-1331 -715.08,-1333.92 -712.92,-1333.92 -547,-1168 -169.25,-1168 60,-938.75 60,-900.27 U2.38
INLB: J3.21 U2.40 | length 828.4
  Top Layer w10: J3.21@-440.71,-1367.83 -272.87,-1200 -154.63,-1200 92,-953.37 92,-876 U2.40@59,-843
INLC: J3.19 U2.42 | length 650.4
  Top Layer w10: J3.19@-110,-1367.83 -110,-1200.63 124,-966.63 124,-853 U2.42@96.64,-825.64
NetC1_1: C1.1 U1.6 | length 238.7
  Top Layer w10: C1.1@1219,-1471 C1.1@1221,-1469 ; U1.6@1368.39,-1367 1373.99,-1361.4 U1.6
  Top Layer w20: C1.1@1221,-1469 1221,-1417 1271,-1367 U1.6@1368.39,-1367
NetC1_2: C1.2 L1.1 U1.2 | length 596.8
  Top Layer w50: v1(1122,-1555) 1122.34,-1555.34 C1.2
  Bottom Layer w50: v1(1122,-1555) 1528,-1555 v1(1602,-1481)
NetC13_2: C13.2 U2.5 | length 339.9
  Top Layer w10: U2.5 249.76,-507 342.85,-507 374.34,-475.51 C13.2
NetC14_1: C14.1 U2.3 | length 248.3
  Top Layer w10: U2.3 158.44,-654 338,-654 353,-639 353,-614.47 C14.1@353.53,-613.94
NetC14_2: C14.2 U2.4 | length 173
  Top Layer w10: U2.4@136,-649 164,-621 287.41,-621 C14.2@294.47,-613.94
NetC16_2: C16.2 U2.36 | length 323.6
  Top Layer w10: C16.2 -174,-1108 -27,-961 -27,-895 U2.36@-18,-886
NetD1_2: D1.2 R9.1 | length 77.4
  Top Layer w10: R9.1 916.45,-731 D1.2
NetD2_2: D2.2 R10.1 | length 90.2
  Top Layer w10: R10.1 914.51,-832 D2.2
NetD3_1: D3.1 R13.2 | length 139.5
  Top Layer w30: R13.2 D3.1
NetD4_1: D4.1 R14.2 | length 241.2
  Top Layer w30: D4.1 -577,800 -577,588.95 -582.72,583.23 -582.72,582.24 -580.98,580.51 R14.2 ; R14.2@-582,582 -580.24,582 R14.2@-580,582.24
NetJ6_2: J6.2 R3.1 R6.2 | length 296.6
  Top Layer w10: J6.2 -1534.78,-1166.22 -1490.51,-1210.49 R3.1@-1456.49,-1210.49 ; R3.1 -1430.98,-1210.49 -1419.49,-1199 R6.2
NetJ6_3: J6.3 R4.1 R7.2 | length 423.3
  Top Layer w10: J6.3 -1428.48,-1087.48 -1419.49,-1078.49 R7.2 -1395.55,-1051 -1381.98,-1064.57 -1381.98,-1210 R4.1
NetJ6_4: J6.4 R5.1 R8.2 | length 545.1
  Top Layer w10: J6.4 -1437.74,-1008.74 -1419.49,-990.49 R8.2 -1379,-968 -1309.98,-1037.02 -1309.98,-1210.49 R5.1
NetR1_2: R1.2 R2.1 U1.4 | length 919.8
  Top Layer w10: U1.4 1413.6,-1286.6 1447,-1320 1447,-1372 1430,-1389 1289.37,-1389 1267,-1411.37 1267,-1562.77 1282.23,-1578 1553,-1578 1596.28,-1621.28 1596.28,-1623.27 R2.1@1608.51,-1635.49 ; R2.1@1613,-1636 1621,-1628 R1.2@1678,-1628
NetU2_47: U2.47 W1.2 | length 120.6
  Top Layer w6: U2.47 198.86,-788.58 198.86,-829.44 199.55,-830.13 199.55,-848.16 W1.2
NetU2_48: U2.48 W2.2 | length 102.1
  Top Layer w6: U2.48 W2.2
nFault: J3.4 R18.1 U2.28 | length 3573.4
  Top Layer w10: R18.1 -503,-817.98 -491.27,-829.72 -490.28,-829.72 -472,-848 -322.01,-848 ; U2.28 -136.63,-782.03 -136.63,-787.24 -197.39,-848 -322.01,-848 ; J3.4@382,-1536 167,-1751 -851.22,-1751 -887.87,-1714.35 -1115.8,-1714.35 -1174,-1656.14 -1174,-1223.86 -871.14,-921 -347.51,-921 -339,-912.49 -339,-864.99 -322.01,-848
SCLK: J3.7 U2.31 | length 2705.6
  Top Layer w10: J3.7@-110,-1545 -268,-1703 -831.34,-1703 -867.99,-1666.35 -1085.49,-1666.35 -1126,-1625.84 -1126,-1254.16 -840.84,-969 -327.62,-969 -327.48,-968.86 -239.94,-968.86 U2.31
SHA: D3.2 J4.1 J4.2 Q1.3 Q2.2 R20.1 TP3.1 U2.9 | length 5073
  Top Layer w10: U2.9 68.79,-576.61 68.79,-576.21 251,-394 ; 1159,1004 1160,1005
  Top Layer w15: R20.1 171.51,-961.98 v1(172,-961.5) ; 251,-394 589,-394 868,-115 868,566 841,593 710,593 667,636 667,813 670,816 670,817
  Bottom Layer w15: v1(172,-961.5) 230.5,-1020 338,-1020 846.55,-511.45 846.55,-278 1118,-6.55 1118,268.3 1473,623.3 v1(1473,1205)
  other v1: 600,1100 700,1100 800,1100 900,1100 1000,1100 1100,1100 1200,1100 1300,1100 1400,1100 1500,1100 1600,1100 650,1200 750,1200 850,1200 950,1200 1050,1200 1150,1200 1250,1200 1350,1200 1550,1200 1650,1200 600,1300 700,1300 800,1300 900,1300 1000,1300 1100,1300 1200,1300 1300,1300 1400,1300 1500,1300 1600,1300 650,1400 750,1400 850,1400 950,1400 1050,1400 1150,1400 1250,1400 1350,1400 1450,1400 1550,1400 1650,1400
SHB: J5.1 J5.2 Q3.3 Q4.2 R21.1 TP2.1 U2.16 | length 4219.2
  Top Layer w10: -72.98,-447.82 -78,-452.84 -78,-567.29 -59.16,-586.13 U2.16
  Top Layer w15: -72.98,-447.82 105,-269.84 105,550 15,640 15,1063 14,1064 14,1089 ; v1(298,-961.5) 299.46,-962.95 R21.1
  Bottom Layer w15: v1(11,1246) 2.38,1237.38 2.38,654 142.67,513.71 142.67,-568 298,-723.33 v1(298,-961.5)
  other v1: -400,1200 -300,1200 -200,1200 -100,1200 0,1200 100,1200 200,1200 300,1200 400,1200 -350,1300 -250,1300 -150,1300 -50,1300 50,1300 150,1300 250,1300 350,1300 450,1300 -400,1400 -300,1400 -200,1400 -100,1400 0,1400 100,1400 200,1400 300,1400 400,1400
SHC: D4.2 J2.1 J2.2 Q5.3 Q6.2 R22.1 TP1.1 U2.19 | length 5253.1
  Top Layer w10: -235.63,-493.29 U2.19
  Top Layer w15: -936,889 -831,784 -696.3,784 -661,748.7 -661,-66.06 -519.21,-207.85 -519.21,-208.09 -248.17,-479.13 -247.93,-479.13 -235.63,-491.43 -235.63,-493.29 ; v1(454.53,-959) 455.51,-959.98 R22.1
  Top Layer w50: D4.2 -588,1098 -587,1099
  Top Layer w100: -580,1175 -565,1190
  Bottom Layer w15: v1(-570,1356) -570,-363.29 121.71,-1055 358.53,-1055 v1(454.53,-959)
  other v1: -1700,1200 -1600,1200 -1500,1200 -1400,1200 -1300,1200 -1200,1200 -1100,1200 -1000,1200 -900,1200 -800,1200 -700,1200 -600,1200 -1650,1300 -1550,1300 -1450,1300 -1350,1300 -1250,1300 -1150,1300 -1050,1300 -950,1300 -850,1300 -750,1300 -650,1300 -550,1300 -1700,1400 -1600,1400 -1500,1400 -1400,1400 -1300,1400 -1200,1400 -1100,1400 -1000,1400 -900,1400 -800,1400 -700,1400 -600,1400
SIMO: J3.6 U2.30 | length 2921.9
  Top Layer w10: U2.30 -244.41,-945.49 -326.74,-945.49 -334.25,-953 -852.68,-953 -1142,-1242.32 -1142,-1637.68 -1097.33,-1682.35 -874.62,-1682.35 -837.96,-1719 -118.65,-1719 J3.6
SNA: C2.1 C3.1 C4.2 C5.2 C6.2 C7.1 C8.1 C9.1 C15.1 C16.1 C17.1 C19.1 C20.1 C21.1 J1.2 J3.2 J6.5 R2.2 R9.2 R10.2 R11.1 R13.1 R14.1 R15.1 R16.1 R17.1 R19.1 R23.2 R24.2 R25.2 TP13.1 U1.1 U2.1 U2.2 U2.12 U2.13 U2.22 U2.27 U2.35 U2.43 U2.44 U2.45 U2.49 W1.1 W2.1 | length 6060.8
  Top Layer w10: C9.1 -1517,-1570.06 -1517,-1597 v1(-1519,-1599) ; C8.1 -1420,-1590 v1(-1420,-1607) ; C7.1 v1(-1331,-1599) ; R17.1@-1402,-93 -1401.49,-92.49 -1401.49,-76.49 -1384,-59 -1294.63,-59 -1124.63,-229 -583.44,-229 U2.22 ; R11.1@-441,-1105 -388.41,-1105 -379.41,-1114 v1(-374,-1114) -368.59,-1114 -362.59,-1108 C16.1 ; v1(-425,-815) -424,-814 -196.44,-814 U2.27 ; v1@-375,-1112 -375,-1051 -355.06,-1031.06 R19.1 ; v1(-71,-943) -66,-938 -66,-906 -65.73,-906 U2.35 ; U2.13 -17.4,-544.38 -30,-531.78 -30,-485.79 179.5,-276.29 179.5,-70.5 209,-41 336,-41 352,-57 352,-103 R16.1@353,-104 ; U2.12 45,-516.89 v1(45,-477) ; U2.49@73,-773 73,-774.08 U2.43 ; U2.49@80,-751 80,-753.24 U2.44 ; U2.49@97,-742 97,-742.4 U2.45 ; R23.2 114.51,-1189.02 C19.1 162.7,-1239.17 173.63,-1239.17 v1(177.46,-1243) ; U2.49@125,-717 U2.49@127.27,-717 ; U2.49@131,-708 132.27,-708 U2.2 170.51,-683.68 U2.1 ; W1.1 279.1,-833.1 W2.1 382.75,-832.38 v1(386.13,-829) ; R24.2 298.47,-1120.94 C20.1 298.47,-1202.47 v1(343,-1247) ; C15.1 426.97,-546.97 v1(429,-549) ; C21.1 454.53,-1189.02 R25.2 455.51,-1190.98 467.24,-1202.72 468.23,-1202.72 507.69,-1242.17 519.72,-1242.17 v1(523.55,-1246) ; R10.2 846.49,-824.02 834.76,-812.28 807.32,-812.28 v1(775.5,-780.47) 825.97,-730 R9.2 ; v1(1094,-1325) v1@1097,-1322 ; U1.1@1486.65,-1364.89 U1.1 1498.01,-1361.4 1504.82,-1368.21 1504.82,-1374.46 ; v1@1529.54,-1399.17 1540.17,-1399.17 v1(1544,-1403) ; R2.2@1595,-1562 1595.24,-1562.24 1596.28,-1562.24 1603,-1568.96 R2.2@1603,-1570 ; R2.2 v1(1670,-1573.98)
  Top Layer w15: v1(1077,-1483) 1077,-1568.32 1118.34,-1609.66 C3.1 ; v1@1097,-1322 C2.1
  Top Layer w20: 1504.82,-1374.46 v1@1529.54,-1399.17
  Top Layer w30: R14.1 -580,-76.7 -430.85,-225.85 -335.85,-225.85 C6.2@-238,-128
  other v1: 1120,-680 1200,-680 1280,-680 1360,-680 1440,-680 1520,-680 -1675,-600 -1600,-600 -1525,-600 -1450,-600 -1375,-600 -1300,-600 -1225,-600 1080,-600 1400,-600 1480,-600 1560,-600 1640,-600 -1637.5,-525 -1562.5,-525 -1487.5,-525 -1412.5,-525 -1337.5,-525 -1262.5,-525 -1187.5,-525 960,-520 1040,-520 1120,-520 1360,-520 1440,-520 1520,-520 1600,-520 1680,-520 -1675,-450 -1600,-450 -1525,-450 -1450,-450 -1375,-450 -1300,-450 -1225,-450 1000,-440 1080,-440 1160,-440 1240,-440 1320,-440 1400,-440 1560,-440 1640,-440 -1637.5,-375 -1562.5,-375 -1487.5,-375 -1412.5,-375 -1337.5,-375 -1262.5,-375 -1187.5,-375 960,-360 1040,-360 1120,-360 1200,-360 1280,-360 1360,-360 1440,-360 1520,-360 1600,-360 1680,-360 -1600,-300 -1525,-300 -1450,-300 -1375,-300 -1300,-300 -1225,-300 1000,-280 1080,-280 1160,-280 1240,-280 1320,-280 1400,-280 1480,-280 1560,-280 1640,-280 445,-270 515,-270 585,-270 -1637.5,-225 -1562.5,-225 -1487.5,-225 -1412.5,-225 -1337.5,-225 -1262.5,-225 480,-200 550,-200 620,-200 1120,-200 1200,-200 1280,-200 1360,-200 1440,-200 1520,-200 1600,-200 1680,-200 -1675,-150 -1600,-150 -1525,-150 445,-130 515,-130 585,-130 655,-130 725,-130 1160,-120 1240,-120 1320,-120 1480,-120 1560,-120 1640,-120 -1637.5,-75 -1562.5,-75 480,-60 550,-60 620,-60 690,-60 760,-60 445,10 515,10 585,10 655,10 725,10 550,80 620,80 690,80 585,150 655,150 725,150 795,150 550,220 620,220 690,220 760,220 585,290 655,290 725,290 795,290 550,360 620,360 690,360 760,360 585,430 655,430 725,430 690,500 760,500
  other v2: 0,-837.49 -30.62,-806.87 30.62,-806.87 -61.25,-776.25 0,-776.25 61.25,-776.25 -91.87,-745.62 -30.62,-745.62 30.62,-745.62 91.87,-745.62 -122.49,-715 -61.25,-715 0,-715 61.25,-715 122.49,-715 -91.87,-684.38 -30.62,-684.38 30.62,-684.38 91.87,-684.38 -61.25,-653.75 0,-653.75 61.25,-653.75 -30.62,-623.13 30.62,-623.13 0,-592.51
SOA: J3.13 U2.25 | length 4296.7
  Top Layer w10: U2.25 -180.15,-742.03 -714.8,-742.03 -1190,-1217.23 -1190,-1662.77 -1122.42,-1730.35 -894.5,-1730.35 -857.85,-1767 751,-1767 834,-1684 932.95,-1684 1000.47,-1616.47 1000.47,-1422.78 945.53,-1367.83 J3.13@882.13,-1367.83
SOB: J3.14 U2.24 | length 4753.2
  Top Layer w10: U2.24 -180.15,-687.97 -683.37,-687.97 -1206,-1210.6 -1206,-1669.4 -1129.05,-1746.35 -901.13,-1746.35 -864.47,-1783 757.63,-1783 840.63,-1700 939.58,-1700 1016.47,-1623.1 1016.47,-1279.47 989,-1252 832.61,-1252 J3.14
SOC: J3.15 U2.23 | length 5053.4
  Top Layer w10: U2.23 -156.7,-683.68 -175.54,-664.84 -685.89,-664.84 -1222,-1200.95 -1222,-1676.03 -1135.68,-1762.35 -907.75,-1762.35 -871.1,-1799 764.25,-1799 847.25,-1716 946.2,-1716 1032.47,-1629.73 ; J3.15@551.42,-1367.83 683.25,-1236 997,-1236 1032.47,-1271.47 1032.47,-1626.47 1034,-1628
SOMI: J3.5 R12.1 U2.29 | length 3224.8
  Top Layer w10: R12.1@-308.49,-893 -222,-893 ; U2.29 -256.24,-929.49 -333.37,-929.49 -340.88,-937 -864.52,-937 -1158,-1230.48 -1158,-1649.52 -1109.17,-1698.35 -881.24,-1698.35 -844.59,-1735 30.71,-1735 J3.5@220.71,-1545
SPA: Q2.3 R15.2 U2.11 | length 1423.8
  Top Layer w10: U2.11 240.73,-349 565.44,-349 791,-123.44 791,21 v4(790,22) ; v4(1021,23) 1025,27 R15.2@1025,128
  Bottom Layer w10: v4(790,22) 1019,22 1020,23 v4(1021,23)
SPB: Q4.3 R16.2 U2.14 | length 895.7
  Top Layer w10: U2.14 -46,-543.73 -46,-479.16 163.5,-269.66 163.5,27.5 179,43 325,43 342,60 342,85
SPC: Q6.3 R17.2 U2.21 | length 1565.3
  Top Layer w10: -1398,8 -1398,-28 -1383,-43 -1288,-43 -1118,-213 -571.6,-213 U2.21
SSEL: J3.8 U2.32 | length 2489.3
  Top Layer w10: J3.8@-275.35,-1545 -417.35,-1687 -824.71,-1687 -861.36,-1650.35 -1073.65,-1650.35 -1110,-1614 -1110,-1266 -829,-985 -321,-985 -320.85,-984.86 -228.1,-984.86 U2.32
V_BATT: C2.2 C4.1 C5.1 C6.1 C13.1 C15.2 D1.1 J1.1 Q1.2 Q3.2 Q5.2 U1.3 U1.5 U2.6 U2.7 | length 754.7
  Top Layer w10: U2.7 200.25,-500.83 214.17,-500.83 v1(218,-497) 251,-464 C13.1 ; U2.6 214.17,-514.75 214.17,-503.83 v1@216,-502 ; v1(230,-572) 255.03,-546.97 C15.2 ; D1.1 1043.59,-731.98 1054.34,-742.73 1055.32,-742.73 1145.9,-833.31 1229.61,-833.31 J1.1
  other v1: -440,-120 -360,-120 -120,-120 -40,-120 40,-120 -480,-40 -400,-40 -320,-40 -240,-40 -160,-40 -80,-40 0,-40 1220,-30 1310,-30 1400,-30 1490,-30 1580,-30 1670,-30 -1090,0 -1030,0 -970,0 -850,0 -790,0 -730,0 -440,40 -360,40 -120,40 -40,40 40,40 -1120,60 -1060,60 -1000,60 -820,60 -760,60 1220,60 1310,60 1490,60 1580,60 1670,60 -1090,120 -1030,120 -970,120 -910,120 -850,120 -790,120 -730,120 -480,120 -400,120 -320,120 -160,120 -80,120 0,120 1220,150 1310,150 1400,150 1490,150 1580,150 1670,150 -1120,180 -1060,180 -1000,180 -940,180 -880,180 -820,180 -760,180 -440,200 -360,200 -280,200 -200,200 -120,200 -40,200 40,200 -1090,240 -1030,240 -970,240 -910,240 -850,240 -790,240 -730,240 1220,240 1310,240 1400,240 1490,240 1580,240 1670,240 -480,280 -400,280 -320,280 -240,280 -160,280 -80,280 0,280 -1120,300 -1060,300 -1000,300 -940,300 -880,300 -820,300 -760,300 1220,330 1310,330 1400,330 1490,330 1580,330 1670,330 1670,420 1670,510 1670,600 1670,690
VoltA: C19.2 J3.18 R20.2 R23.1 | length 342.8
  Top Layer w20: J3.18 54.47,-1366.95 C19.2 54.47,-1126.08 R23.1 53.49,-1107 102.77,-1057.72 103.76,-1057.72 110.49,-1050.98 R20.2
VoltB: C20.2 J3.17 R21.2 R24.1 | length 326
  Top Layer w20: J3.17@220.71,-1367.83 239.42,-1349.13 C20.2 239.42,-1120.94 R24.1 R21.2
VoltC: C21.2 J3.16 R22.2 R25.1 | length 322.1
  Top Layer w20: J3.16 394.49,-1359.41 R25.1 394.49,-1120.98 C21.2 394.49,-1119.02 R22.2
pads on no net: J1.3 J1.4 J2.3 J2.4 J3. J3.3 J4.3 J4.4 J5.3 J5.4 U2.46
copper on no net: | length 1676
  Top Layer w6: -1069,-624 -469,-624 -469,-386 -1069,-386 -1069,-624

## Polygon pours and split planes (outlines as drawn)
V_BATT on Top Layer "Top Layer-V_BATT 1" (solid, pour order 16): -508.41,732 80,732 80,-207 -513.97,-207
V_BATT on Top Layer "Top Layer-V_BATT 2" (solid, pour order 18): -1159,758 -1159,760 -690,760 -690,-72 -1202,-72 -1202,758
SNA on Top Layer "Top Layer-SNA" (solid, pour order 26): -1744,-52 -1727,-35 -1466,-35 -1404,-97 -1332,-97 -1119,-310 -1119,-644 -1677,-644 -1742,-579 -1742,-108
SPC on Top Layer "Top Layer-SPC 1" (solid, pour order 20): -1467,354 -1467,549 -1423,593 -1238,593 -1221,576 -1221,65 -1304,-18 -1674,-18 -1746,54 -1746,266 -1686,326 -1505,326
+3.3V on Top Layer "Top Layer-+3.3V" (solid, pour order 32): 1059,-1999 1060,-2000 1750,-2000 1750,-1715 1704,-1669 1077,-1669 1059,-1687
NetC1_2 on Top Layer "Top Layer-NetC1_2" (solid, pour order 34): 1463,-1307 1649,-1307 1672,-1330 1672,-1497 1630,-1539 1310,-1539 1273,-1502 1273,-1419 1528,-1419 1549,-1398 1549,-1370 1520,-1341 1464,-1341 1461,-1338 1461,-1309
V_BATT on Top Layer "Top Layer-V_BATT" (solid, pour order 36): 1235,-1287 1235,-1351 1247,-1351 1263,-1351 1339,-1351 1350,-1340 1407,-1340 1407,-1309 1405,-1307 1351,-1307 1346,-1302 1346,-1258 1356,-1248 1457,-1248 1467,-1258 1467,-1300 1524,-1300 1549,-1275 1549,-834 1212.16,-834 1212.16,-1275.58
SNA on Top Layer "Top Layer-SNA 1" (solid, pour order 28): 1158,-54 1192,-88 1749,-88 1751,-90 1751,-541 1590,-702 1079,-702 915,-538 915,-54
SHB on Top Layer "Top Layer-SHB" (solid, pour order 4): -482.65,790.65 -450,758 -274,758 -196,836 -196,1037 -162,1071 -1.41,1071 15,1049.87 15,666 86,595 443,595 503,655 503,2000 -489.62,2000
SNA on Top Layer "Motor_GND_1" (solid, pour order 24): 202,-316 202,-138 256,-84 428,-84 428,23 516,111 516,512 559,555 749,555 789,515 789,337 811,315 816,310 816,84 801,69 766,69 744,47 744,1 765,-20 772,-20 779,-27 779,-110 555,-334 220,-334
SPC on Top Layer "Top Layer-SPC" (solid, pour order 22): -1263,-145
V_BATT on Top Layer "Top Layer-V_BATT 3" (solid, pour order 14): 1189,674 1189,727 1203,741 1749,741 1749,-59 1191,-59 1191,537
SPA on Top Layer "Top Layer-SPA" (solid, pour order 12): 957,581 918,542 918,51 930,39 1118,39 1156,77 1156,551 1126,581
SHA on Top Layer "Top Layer-SHA" (solid, pour order 6): 529.97,1990 1742,1990 1743,1991 1750,1984 1750,1048 1463,1048 1417,1002 1417,843 1384,810 1383,811 1197,811 1156,770 1156,660 1138,642 706,642 706,761 648,819 532,819
SPB on Top Layer "Top Layer-SPB" (solid, pour order 10): 233,63 236,66 450,66 500,116 500,533 485,548 209,548 186,525 186,140
no net on Top Layer "Top Layer-No Net" (solid, pour order 8): 167,67
SHC on Top Layer "SHC_L01_P002" (solid, pour order 2): -1735,720 -1665,650 -1205,650 -1185,670 -1185,825 -1175,835 -985,835 -868.18,920 -868.18,1065 -522,1065 -522,1995 -1745,1995
SHC on Top Layer "Top Layer-SHC" (solid, pour order 0): -1700,800
SHA on Bottom Layer (solid, pour order 46): 530.01,1966.2 1748,1966.2 1748,784 1159,784 1159,566 531,566
no net on Bottom Layer (solid, pour order 44): 1123.5,777
SHB on Bottom Layer (solid, pour order 40): -490,1970 503,1970 503,597 -489.43,597 -489.43,1966.2
SHC on Bottom Layer (solid, pour order 38): -1719.74,1969.74 -522,1969.74 -522,507 -681,348 -1750.57,348
SNA on GND (split plane): 1729.9,-1175.9 1126.11,-1175.9 849.6,-899.4 847.95,-898.29 846,-897.9 111,-897.9 109.05,-898.29 107.4,-899.4 106.29,-901.05 105.9,-903 106.29,-904.95 107.4,-906.6 109.05,-907.71 111,-908.1 843.89,-908.1 1120.4,-1184.6 1122.05,-1185.71 1124,-1186.1 1729.9,-1186.1 1729.9,-1979.9 -1729.9,-1979.9 -1729.9,-686.1 -346.6,-686.1 -143.1,-889.6 -143.1,-1014 -142.71,-1015.95 -141.6,-1017.6 -139.95,-1018.71 -138,-1019.1 -136.05,-1018.71 -134.4,-1017.6 -133.29,-1015.95 -132.9,-1014 -132.9,-887.49 -133.29,-885.54 -134.4,-883.89 -340.89,-677.4 -342.54,-676.29 -344.49,-675.9 -1729.9,-675.9 -1729.9,1979.9 1729.9,1979.9
+3.3V on Power (split plane): 986.77,-1115.19 987.29,-1116.17 989.79,-1119.21 992.83,-1121.71 996.31,-1123.57 996.61,-1123.66 998.31,-1124.57 1002.08,-1125.71 1006,-1126.1 1009.92,-1125.71 1011.94,-1125.1 1729.9,-1125.1 1729.9,-1979.9 -1032.9,-1979.9 -1032.9,-1235.32 -538.68,-741.1 612.68,-741.1
V_BATT on Power (split plane): 1729.9,-1084.9 1013.32,-1084.9 635.21,-706.79 632.17,-704.29 628.69,-702.43 624.92,-701.29 621,-700.9 -547,-700.9 -550.92,-701.29 -554.69,-702.43 -558.17,-704.29 -561.21,-706.79 -1067.21,-1212.79 -1069.71,-1215.83 -1071.57,-1219.31 -1072.71,-1223.08 -1073.1,-1227 -1073.1,-1979.9 -1729.9,-1979.9 -1729.9,1979.9 1729.9,1979.9

## Other copper
Top Layer:
  text "SEM" at -1043,-611 h300
Bottom Layer:
  region: 287 vertices and 1 holes, not listed, extent -1313,-1270 -593,-550
  region: 225 vertices and 0 holes, not listed, extent -1185,-982 -953,-734
  region: -817,-942 -817,-950 -809,-950 -809,-958 -801,-958 -801,-950 -745,-950 -745,-958 -729,-958 -729,-950 -673,-950 -673,-958 -665,-958 -665,-966 -665,-974 -665,-982 -665,-990 -665,-998 -673,-998 -673,-1006 -681,-1006 -681,-998 -689,-998 -689,-990 -729,-990 -729,-982 -745,-982 -745,-990 -753,-990 -753,-982 -753,-974 -753,-966 -793,-966 -793,-974 -793,-982 -793,-990 -889,-990 -889,-982 -897,-982 -897,-990 -961,-990 -961,-982 -969,-982 -969,-974 -969,-966 -993,-966 -993,-974 -993,-982 -1001,-982 -1001,-990 -1009,-990 -1009,-982 -1017,-982 -1017,-974 -1017,-966 -1009,-966 -1009,-958 -1009,-950 -969,-950 -969,-958 -961,-958 -961,-950 -905,-950 -905,-958 -889,-958 -889,-950 -825,-950 -825,-942 -825,-934 -817,-934 hole: -681,-966 -721,-966 -721,-974 -681,-974 hole: -825,-958 -833,-958 -833,-966 -881,-966 -881,-974 -825,-974 -825,-966 hole: -913,-966 -953,-966 -953,-974 -913,-974 hole: -681,-982 -689,-982 -689,-990 -681,-990
  region: -665,-862 -665,-870 -665,-878 -673,-878 -673,-886 -665,-886 -665,-894 -729,-894 -729,-902 -665,-902 -665,-910 -665,-918 -729,-918 -729,-910 -745,-910 -745,-902 -753,-902 -753,-910 -761,-910 -761,-918 -817,-918 -817,-910 -825,-910 -825,-902 -841,-902 -841,-910 -849,-910 -849,-918 -905,-918 -905,-910 -913,-910 -913,-902 -913,-894 -921,-894 -921,-886 -913,-886 -913,-878 -913,-870 -913,-862 -913,-854 -905,-854 -905,-862 -897,-862 -897,-870 -897,-878 -897,-886 -897,-894 -897,-902 -857,-902 -857,-894 -857,-886 -857,-878 -857,-870 -857,-862 -849,-862 -849,-854 -841,-854 -841,-862 -833,-862 -833,-870 -825,-870 -825,-862 -817,-862 -817,-854 -761,-854 -761,-862 -753,-862 -753,-870 -737,-870 -737,-862 -729,-862 -729,-854 -665,-854 hole: -761,-878 -817,-878 -817,-886 -817,-894 -761,-894 -761,-886
  region: -1217,-878 -1217,-886 -1209,-886 -1209,-894 -1209,-902 -1209,-910 -1201,-910 -1201,-918 -1193,-918 -1193,-926 -1185,-926 -1185,-934 -1177,-934 -1177,-942 -1169,-942 -1169,-950 -1161,-950 -1161,-958 -1153,-958 -1153,-966 -1137,-966 -1137,-974 -1129,-974 -1129,-982 -1121,-982 -1121,-990 -1105,-990 -1105,-998 -1097,-998 -1097,-1006 -1089,-1006 -1089,-1014 -1081,-1014 -1081,-1022 -1081,-1030 -1073,-1030 -1073,-1038 -1073,-1046 -1065,-1046 -1065,-1054 -1065,-1062 -1057,-1062 -1057,-1070 -1057,-1078 -1065,-1078 -1065,-1070 -1073,-1070 -1073,-1062 -1073,-1054 -1081,-1054 -1081,-1046 -1081,-1038 -1089,-1038 -1089,-1030 -1097,-1030 -1097,-1022 -1105,-1022 -1105,-1014 -1113,-1014 -1113,-1006 -1121,-1006 -1121,-998 -1129,-998 -1129,-990 -1145,-990 -1145,-982 -1153,-982 -1153,-974 -1169,-974 -1169,-966 -1177,-966 -1177,-958 -1185,-958 -1185,-950 -1193,-950 -1193,-942 -1201,-942 -1201,-934 -1209,-934 -1209,-926 -1217,-926 -1217,-918 -1225,-918 -1225,-910 -1225,-902 -1225,-894 -1225,-886 -1225,-878 -1225,-870 -1217,-870
  region: -1193,-838 -1193,-846 -1193,-854 -1193,-862 -1185,-862 -1185,-870 -1185,-878 -1185,-886 -1177,-886 -1177,-894 -1169,-894 -1169,-902 -1169,-910 -1161,-910 -1161,-918 -1153,-918 -1153,-926 -1145,-926 -1145,-934 -1137,-934 -1137,-942 -1121,-942 -1121,-950 -1113,-950 -1113,-958 -1105,-958 -1105,-966 -1097,-966 -1097,-974 -1089,-974 -1089,-982 -1081,-982 -1081,-990 -1073,-990 -1073,-998 -1073,-1006 -1065,-1006 -1065,-1014 -1057,-1014 -1057,-1022 -1057,-1030 -1049,-1030 -1049,-1038 -1049,-1046 -1057,-1046 -1057,-1038 -1065,-1038 -1065,-1030 -1065,-1022 -1065,-1014 -1073,-1014 -1073,-1006 -1081,-1006 -1081,-998 -1081,-990 -1097,-990 -1097,-982 -1105,-982 -1105,-974 -1113,-974 -1113,-966 -1121,-966 -1121,-958 -1129,-958 -1129,-950 -1145,-950 -1145,-942 -1153,-942 -1153,-934 -1161,-934 -1161,-926 -1169,-926 -1169,-918 -1177,-918 -1177,-910 -1185,-910 -1185,-902 -1193,-902 -1193,-894 -1201,-894 -1201,-886 -1201,-878 -1201,-870 -1209,-870 -1209,-862 -1209,-854 -1209,-846 -1201,-846 -1201,-838 -1201,-830 -1193,-830